# Altium PCB board.PcbDoc (part 2 of 2)
Units mm, origin at the board's own origin, x right, y up, seen from the top; angles counter-clockwise.
Board outline 36 x 151.89 mm, 2 copper layers (Top Layer, Bottom Layer), stack 1.66 mm thick; 112 components, 47 nets, 362 pads, 109 vias.
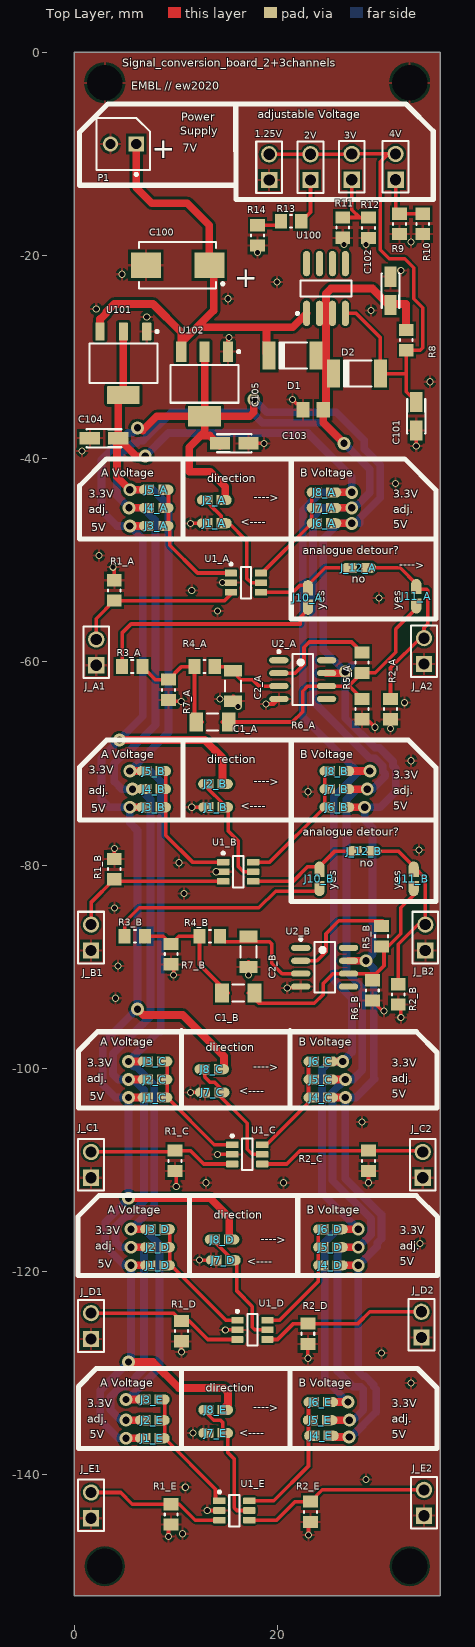
[diagram p0: Top Layer view]

## Silkscreen, mask and mechanical layers (free items; w line width, h text height) (continued)
M12_titleBlock: (continued)
  text "3" at 109.487,-26.53 h1.78
  text "4" at 182.385,-26.53 h1.78
  text "A" at -70.65,-49.543 h1.78
  text "A" at 216.37,-49.543 h1.78
  text "Abstand von Frontpanelkante" at 169.799,-55.499 h1.52
  text "links unten zum Nullpunkt:" at 169.799,-58.039 h1.52
  text "13,9mm" at 169.799,-60.579 h1.52
  text "Mechanical Layer Definitionen:" at 169.799,-66.877 h1.52
  text "M1_boardOutline" at 169.799,-70.739 h1.52
  text "M11_text_topL" at 169.799,-74.497 h1.52
  text "M12_titleBlock" at 169.799,-77.037 h1.52
  text "M13_3D_topL" at 169.799,-79.577 h1.52
  text "M14_3D_botL" at 169.799,-82.117 h1.52
  text "M15_courtyard_topL" at 169.799,-84.373 h1.52
  text "M16_courtyard_botL" at 169.799,-86.913 h1.52
  text "B" at -70.65,-97.599 h1.78
  text "B" at 216.37,-97.599 h1.78
  text "C" at -70.65,-146.113 h1.78
  text "C" at 216.37,-146.113 h1.78
  text "ENGINEER:" at 101.435,-183.121 h1.14
  text "TITLE:" at 139.535,-183.121 h1.14
  text "PCB DESIGNER:" at 101.435,-190.614 h1.14
  text "D" at -70.65,-194.119 h1.78
  text "D" at 216.37,-194.119 h1.78
  text "EMBL - European" at 59.627,-196.786 h1.78
  text "DATE:" at 101.435,-198.361 h1.14
  text "PART NO.:" at 139.535,-198.361 h1.14
  text "REV:" at 192.875,-198.361 h1.14
  text "Molecular Biology Laboratory" at 65.977,-199.326 h1.78
  text "Meyerhofstrasse 1" at 65.977,-201.231 h1.78
  text ".Print_Date" at 102.705,-201.409 h1.78
  text "69117 Heidelberg" at 65.977,-204.406 h1.78
  text "FILE NAME:" at 101.435,-205.981 h1.14
  text "DWG NO:" at 139.535,-205.981 h1.14
  text "SCALE:" at 192.875,-205.981 h1.14
  text "Germany" at 65.977,-207.264 h1.78
  text ".PCB_FILE_NAME_NO_PATH" at 102.705,-209.029 h1.78
  text "1" at -36.309,-214.49 h1.78
  text "3" at 109.487,-214.49 h1.78
  text "4" at 182.385,-214.49 h1.78